# Altium PCB Ad_Fpga.PcbDoc (part 3 of 8)
Units mil, origin at the board's own origin, x right, y up, seen from the top; angles counter-clockwise.
Board outline 5995 x 3921.26 mil, 6 copper layers (Top Layer, GND, Mid-Layer 1, Mid-Layer 2, VCC, Bottom Layer); 476 components, 538 nets, 2139 pads, 1047 vias.
Unrouted connection lines stored in the file: 2.
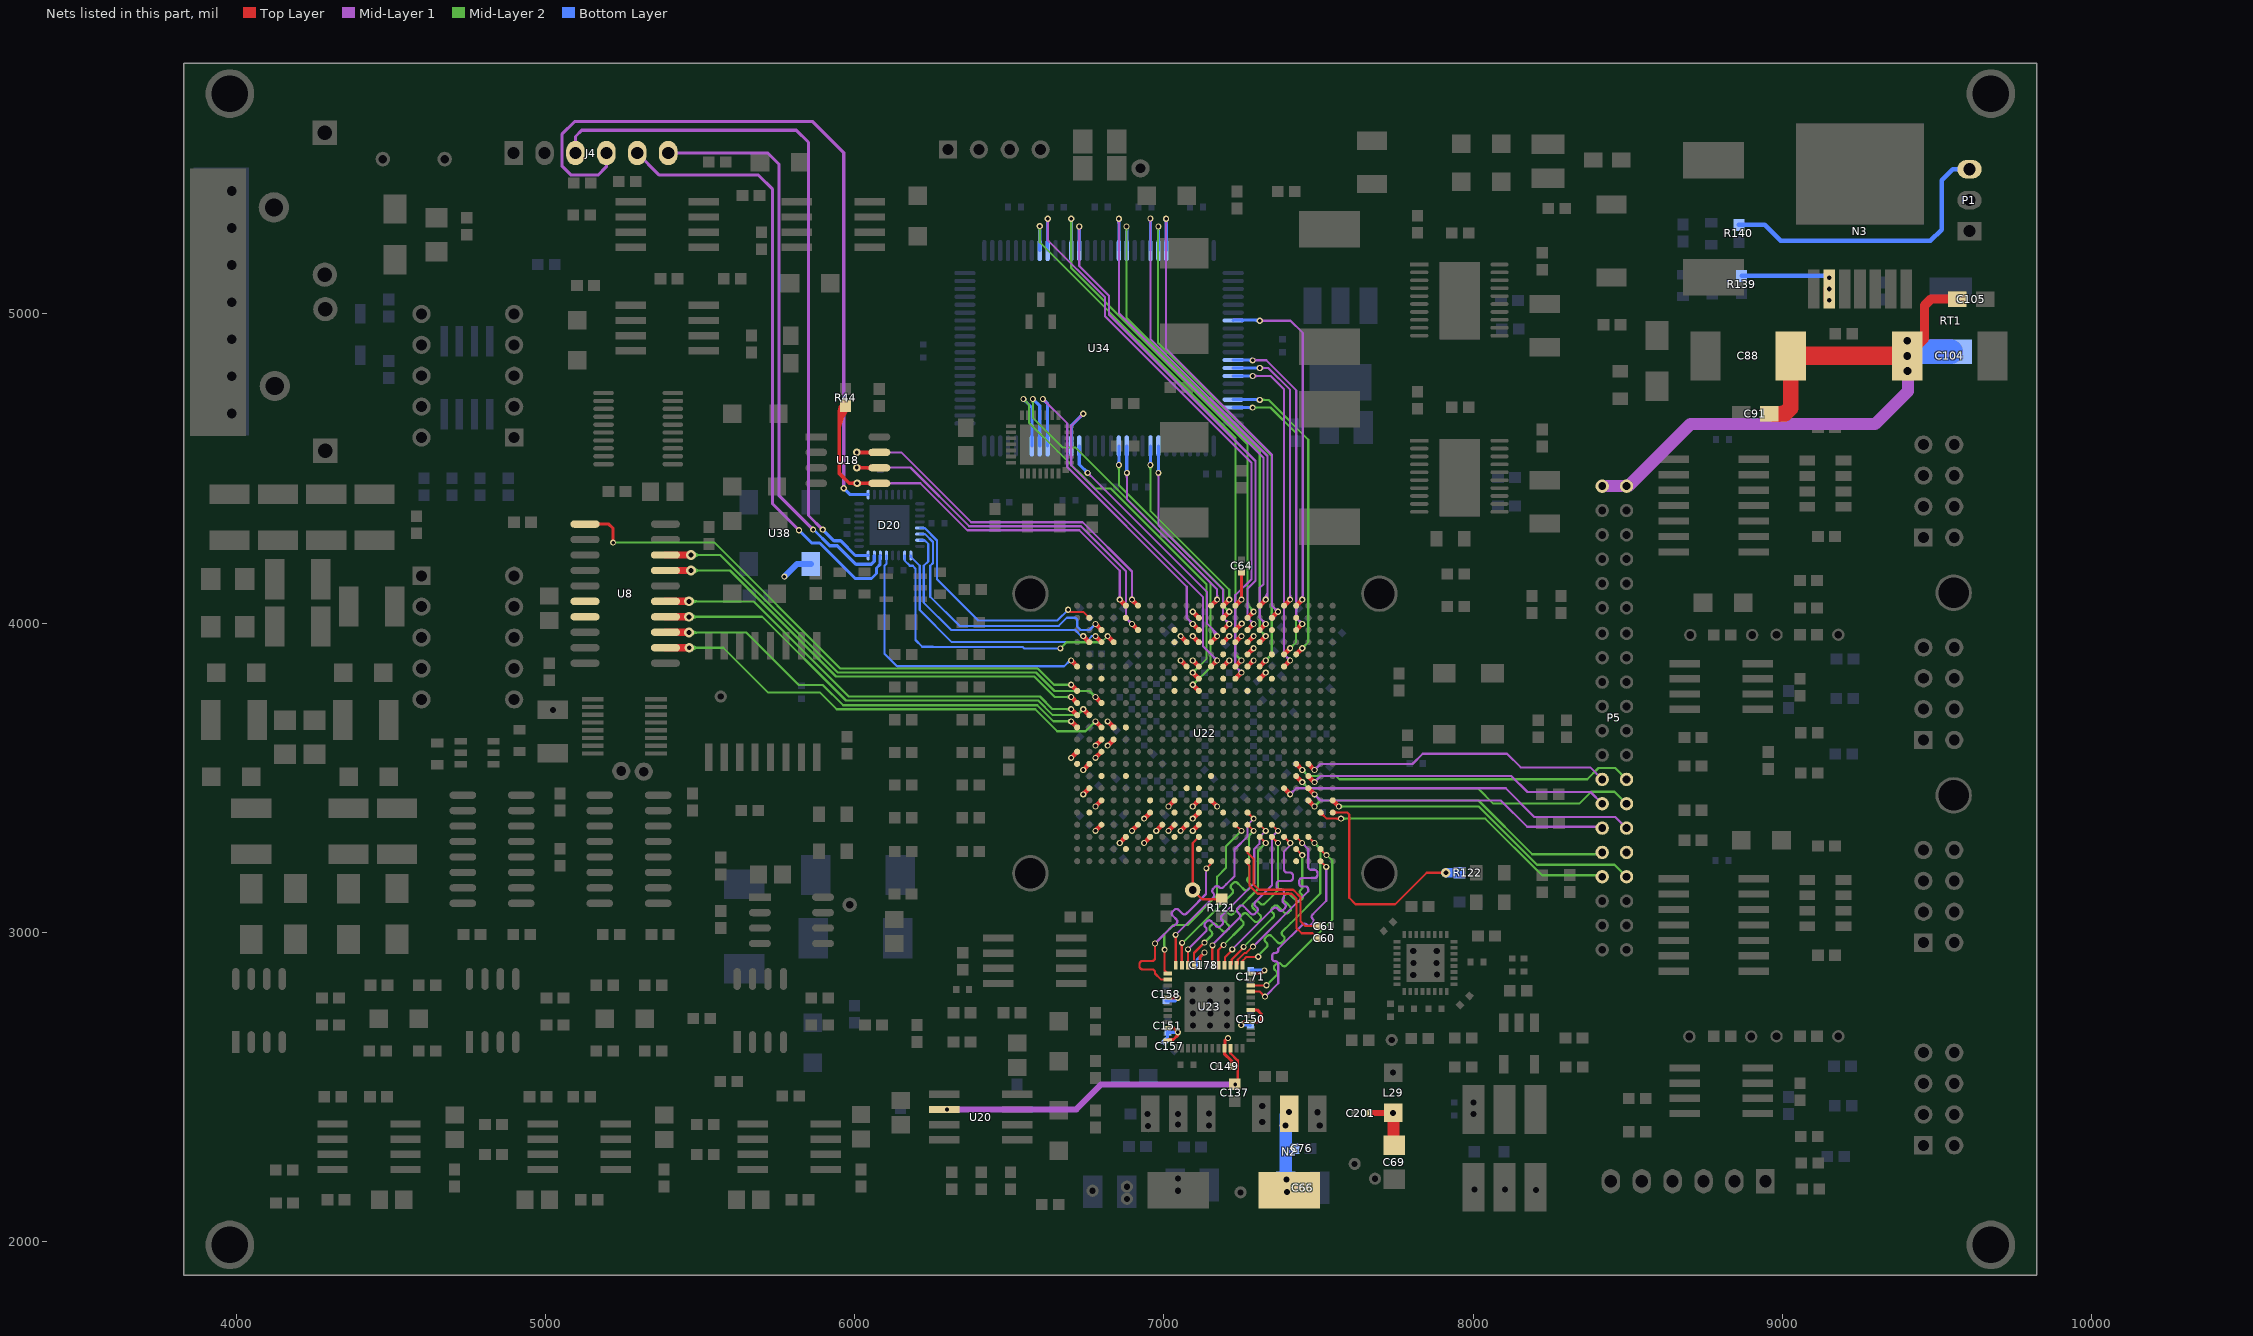
[diagram p7: the nets of this part, all layers, seen from the top]

## Via types
v1: diameter 19.68, hole 11.81, Top Layer to Bottom Layer, 523 vias
v2: diameter 50, hole 25, Top Layer to Bottom Layer, 162 vias
v3: diameter 30, hole 15, Top Layer to Bottom Layer, 100 vias
v4: diameter 39.37, hole 19.68, Top Layer to Bottom Layer, 75 vias
v5: diameter 31.5, hole 15.75, Top Layer to Bottom Layer, 44 vias
v6: diameter 40, hole 20, Top Layer to Bottom Layer, 38 vias
v7: diameter 24, hole 12, Top Layer to Bottom Layer, 33 vias
v8: diameter 47.24, hole 23.62, Top Layer to Bottom Layer, 24 vias
v9: diameter 59.06, hole 31.5, Top Layer to Bottom Layer, 10 vias
v10: diameter 60, hole 30, Top Layer to Bottom Layer, 9 vias
v11: diameter 25.98, hole 12.99, Top Layer to Bottom Layer, tented top, 9 vias
v12: diameter 23.62, hole 11.81, Top Layer to Bottom Layer, 8 vias
v13: diameter 50, hole 27.56, Top Layer to Bottom Layer, 4 vias
v14: diameter 51.18, hole 27.56, Top Layer to Bottom Layer, 2 vias
v15: diameter 39.37, hole 23.62, Top Layer to Bottom Layer, 2 vias
v16: diameter 80, hole 40, Top Layer to Bottom Layer, 1 vias
v17: diameter 47.24, hole 19.68, Top Layer to Bottom Layer, 1 vias
v18: diameter 47.24, hole 27.56, Top Layer to Bottom Layer, 1 vias
v19: diameter 22.05, hole 11.81, Top Layer to Bottom Layer, 1 vias

## Nets (pads, with @x,y where several pads share a name; then routed paths per layer and width w, separated by ;. In a path a pad name is that pad's centre, name@x,y a point inside that pad or via, vN(x,y) a via of type N, cw(c..) or ccw(c..) an arc to the next point about the centre after c; other vN are vias at no path point) (continued)
B1_NC34: U22.M21
B1_NC38: U22.D22
B1_NC39: U22.V21
B1_NC41: U22.M19 | length 27.8
  Top Layer w15: v1(7093.24,3327.65) U22.M19@7112.93,3347.34
B1_NC42: U22.N19 | length 27.8
  Top Layer w15: v1(7053.87,3327.65) U22.N19@7073.56,3347.34
B1_NC43: U22.M16
B1_NC44: U22.L15
B1_NC45: U22.P19 | length 27.8
  Top Layer w15: v1(7014.5,3327.65) U22.P19@7034.19,3347.34
B1_NC46: U22.P20
B1_NC49: U22.L17 | length 27.8
  Top Layer w15: U22.L17@7152.3,3426.08 v1(7171.99,3406.39)
B1_NC50: U22.K18
B1_NC51: U22.U19 | length 27.8
  Top Layer w15: v1(6896.39,3327.65) U22.U19@6916.08,3347.34
B1_NC52: U22.V20 | length 27.8
  Top Layer w15: v1(6857.02,3288.28) U22.V20@6876.71,3307.97
B1_NC53: U22.M17 | length 27.8
  Top Layer w15: v1(7093.24,3406.39) U22.M17@7112.93,3426.08
B1_NC54: U22.M18 | length 27.8
  Top Layer w15: v1(7093.24,3367.02) U22.M18@7112.93,3386.71
B1_NC55: U22.P17 | length 27.8
  Top Layer w15: v1(7014.5,3406.39) U22.P17@7034.19,3426.08
B1_NC56: U22.N16
B1_NC57: U22.P18
B1_NC58: U22.R19 | length 27.8
  Top Layer w15: v1(6975.13,3327.65) U22.R19@6994.82,3347.34
B1_NC59: U22.T20 | length 27.8
  Top Layer w15: v1(6935.76,3288.28) U22.T20@6955.45,3307.97
B4NC1: U22.J3 | length 29.6
  Top Layer w15: U22.J3@7231.04,3977.26 v1(7251.78,3998) v1@7252,3998
B4NC2: U22.M2 | length 27.8
  Top Layer w15: v1(7093.24,4036.32) U22.M2@7112.93,4016.63
B4NC3: U22.K5
B4NC4: U22.H6 | length 27.8
  Top Layer w15: U22.H6@7270.41,3859.15 v1(7290.1,3878.84)
B4NC5: U22.F3
B4NC7: U22.M4 | length 27.8
  Top Layer w15: v1(7093.24,3957.58) U22.M4@7112.93,3937.89
B4NC8: U22.J4 | length 27.8
  Top Layer w15: U22.J4@7231.04,3937.89 v1(7250.73,3957.58)
B4NC9: U22.K4 | length 27.8
  Top Layer w15: U22.K4@7191.67,3937.89 v1(7211.36,3957.58)
B4NC10: U22.N4 | length 27.8
  Top Layer w15: v1(7053.87,3957.58) U22.N4@7073.56,3937.89
B4NC11: U22.N6 | length 27.8
  Top Layer w15: v1(7053.87,3878.84) U22.N6@7073.56,3859.15
B4NC12: U22.P3
B4NC13: U22.F5
B4NC14: U22.K7
B4NC15: U22.K8
B4NC16: U22.V2
B4NC18: U22.P8
B4NC19: U22.H8
B4NC20: U22.K6 | length 27.8
  Top Layer w15: U22.K6@7191.67,3859.15 v1(7211.36,3878.84)
B4NC21: U22.P4
B4NC22: U22.G7 | length 27.8
  Top Layer w15: U22.G7@7309.78,3819.78 v1(7329.47,3839.47)
B4NC23: U22.F7
B4NC24: U22.H5 | length 27.8
  Top Layer w15: U22.H5@7270.41,3898.52 v1(7290.1,3918.21)
B4NC25: U22.P7
B4NC26: U22.H4 | length 27.8
  Top Layer w15: U22.H4@7270.41,3937.89 v1(7290.1,3957.58)
B4NC27: U22.M6 | length 27.8
  Top Layer w15: v1(7093.24,3878.84) U22.M6@7112.93,3859.15
B4NC29: U22.D2
BA#: U22.E1 U34.93 | length 1052.9
  Top Layer w15: U22.E1@7388.52,4056 v1(7408.21,4075.69)
  Mid-Layer 1 w7: v1(7310,4825) 7337.62,4825 7408.21,4754.41 v1(7408.21,4075.69) ; 7325.31,4825 cw(c7325.31,4840.31) 7314.48,4829.48 ccw(c7325.31,4840.31) 7325.31,4825 ; 7325.31,4825 ccw(c7325.31,4809.69) 7314.48,4820.52 cw(c7325.31,4809.69) 7325.31,4825 ; 7408.21,4091 cw(c7392.89,4091) 7403.72,4080.17 ccw(c7392.89,4091) 7408.21,4091 ; 7408.21,4091 ccw(c7423.52,4091) 7412.69,4080.17 cw(c7423.52,4091) 7408.21,4091
  Bottom Layer w10: U34.93@7224.06,4825.02 v1(7310,4825) ; 7298.25,4825.02 cw(c7298.25,4813.25) 7306.58,4821.58 ccw(c7298.25,4813.25) 7298.25,4825.02 ; 7298.37,4825.02 ccw(c7298.37,4836.63) 7306.58,4828.42 cw(c7298.37,4836.63) 7298.37,4825.02
BANK0_LED: R122.1 U22.A18 | length 759
  Top Layer w7: U22.A18@7546,3386.71 7593.29,3386.71 7599.39,3380.61 7599.39,3110.61 7620,3090 7748,3090 7850,3192 v5(7912,3192) ; U22.A18@7550.48,3382.22 cw(c7561.31,3371.4) 7561.31,3386.71 cw(c7561.31,3402.02) U22.A18@7550.48,3391.19
  Top Layer w10: U22.A18@7546,3386.71 U22.A18@7547.16,3385.55
  Bottom Layer w31.5: v5(7912,3192) R122.1@7956,3192
BANK2_NC3: U22.T18 | length 27.8
  Top Layer w15: v1(6935.76,3367.02) U22.T18@6955.45,3386.71
BANK2_NC4: U22.Y19 | length 27.8
  Top Layer w15: v1(6778.28,3327.65) U22.Y19@6797.97,3347.34
BANK2_NC6: U22.V15
BANK2_NC7: U22.AA18
BANK2_NC10: U22.AA14 | length 27.8
  Top Layer w15: v1(6738.91,3524.5) U22.AA14@6758.6,3544.19
BANK2_NC13: U22.W12 | length 27.8
  Top Layer w15: v1(6817.65,3603.24) U22.W12@6837.34,3622.93
BANK2_NC16: U22.V11
BANK2_NC20: U22.W11 | length 27.8
  Top Layer w15: v1(6817.65,3681.99) U22.W11@6837.34,3662.3
BANK2_NC25: U22.Y7
BANK2_NC27: U22.AA6
BANK2_NC28: D20.13 U22.AB6 | length 976.7
  Top Layer w15: v1(6699.54,3878.84) U22.AB6@6719.23,3859.15
  Bottom Layer w7: D20.13@6102.16,4218.57 6102.16,4191.88 6096.2,4185.92 6096.2,3899.8 6136,3860 6677,3860 6695.84,3878.84 v1(6699.54,3878.84)
BANK2_NC29: D20.7 U22.AA4 | length 816.2
  Top Layer w15: v1(6738.91,3957.58) U22.AA4@6758.6,3937.89
  Bottom Layer w7: D20.7@6210.43,4267.79 6225.49,4267.79 6237.14,4256.14 6237.14,4199.14 6223,4185 6223,4066 6311.4,3977.6 6533,3977.6 6712.52,3977.6 6732.54,3957.58 v1(6738.91,3957.58)
BANK2_NC30: U22.Y13 | length 27.8
  Top Layer w15: v1(6778.28,3563.87) U22.Y13@6797.97,3583.56
BANK2_NC31: D20.6 U22.Y3 | length 883.1
  Top Layer w15: v1(6778.28,3996.95) U22.Y3@6797.97,3977.26
  Bottom Layer w7: D20.6@6210.43,4287.47 6227.14,4287.47 6252.81,4261.81 6252.81,4194.06 6244,4185.25 6244,4085 6338.4,3990.6 6659.6,3990.6 6686,4017 6714,4017 6719.57,4011.43 6719.57,3988.93 6730.9,3977.6 6758.94,3977.6 v1(6778.28,3996.95)
BANK2_NC32: U22.Y12 | length 27.8
  Top Layer w15: v1(6778.28,3603.24) U22.Y12@6797.97,3622.93
BANK2_NC33: D20.10 U22.W4 | length 970.9
  Top Layer w15: v1(6817.65,3957.58) U22.W4@6837.34,3937.89
  Mid-Layer 2 w7: v1(6665,3918) 6684.55,3937.55 6797.62,3937.55 v1(6817.65,3957.58)
  Bottom Layer w7: D20.10@6161.21,4218.57 6161.21,4201.9 6177.2,4185.92 6177.2,4185 6187,4185 6196,4176 6196,3945 6218,3923 6253,3923 6253.5,3922.5 6469.85,3922.5 6470.03,3922.68 6542.32,3922.68 6547,3918 6664,3918 v1(6665,3918)
BANK2_NC34: D20.9 U22.Y4 | length 835.7
  Top Layer w15: v1(6778.28,3957.58) U22.Y4@6797.97,3937.89
  Bottom Layer w7: D20.9@6180.9,4218.57 6180.9,4214.1 6210,4185 6210,4042 6313.77,3938.23 6746.92,3938.23 6766.27,3957.58 v1(6778.28,3957.58)
BANK2_NC35: D20.5 U22.AA2 | length 771.3
  Top Layer w7: v1(6690,4043) 6691,4043 6698,4036 6739.23,4036 U22.AA2@6758.6,4016.63
  Bottom Layer w7: D20.5@6210.43,4307.16 6225.84,4307.16 6265.81,4267.19 6265.81,4141.19 6399,4008 6655,4008 v1(6690,4043)
BANK2_NC37: U22.T17
BANK2_NC38: U22.Y17 | length 27.8
  Top Layer w15: v1(6778.28,3406.39) U22.Y17@6797.97,3426.08
BANK2_NC39: U22.AB14
BANK2_NC40: U22.AA16 | length 27.8
  Top Layer w15: v1(6738.91,3445.76) U22.AA16@6758.6,3465.45
BANK2_NC41: U22.Y15
BANK2_NC42: U22.AB13 | length 27.8
  Top Layer w15: v1(6699.54,3563.87) U22.AB13@6719.23,3583.56
BATT12V: C88.1 C91.1 C104.1 C105.1 N3.2 P5.39 P5.40 R139.2 RT1.2 | length 2623.4
  Top Layer w30: v2(9405.2,4864) 9461,4919.8 9461,5027 9482,5048 C105.1@9567,5048
  Top Layer w36: v3(9152,5044.56) v3(9152,5080.78)
  Top Layer w50: C91.1@8958,4677 9010,4677 9027.8,4694.8 ; C91.1@8963,4677 ccw(c8979.76,4742.82) 9027.79,4694.79 ; C88.1@9027.8,4864 9027.8,4694.8
  Top Layer w60: C88.1@9027.8,4864 v2(9405.2,4864)
  Mid-Layer 1 w39.37: P5.39@8417.26,4443.22 8496,4443.22 8503.22,4443.22 8704,4644 9301,4644 9407,4750 v2@9407,4815
  Bottom Layer w15: R139.2@8869,5123 9146,5123 v3(9152,5117)
  Bottom Layer w80: v2@9420,4878 RT1.2@9545,4878
  other v2: 9406,4815 9405,4913
BATTI: P1.3 R140.2 | length 956.3
  Bottom Layer w15: R140.2@8860,5288 8944,5288 8995,5237 9480,5237 9516,5273 9516,5432 9552.24,5468.24 P1.3@9606.26,5468.24
BB#: U22.E6 U34.94 | length 1228.5
  Top Layer w15: U22.E6@7388.52,3859.15 v1(7408.21,3878.84)
  Mid-Layer 1 w7: v1(7287,4799) 7345.23,4799 7388.18,4756.05 7388.18,3910.02 7388,3909.84 7388,3899.04 v1(7408.21,3878.84) ; 7302.31,4799 cw(c7302.31,4814.31) 7291.48,4803.48 ccw(c7302.31,4814.31) 7302.31,4799 ; 7302.31,4799 ccw(c7302.31,4783.69) 7291.48,4794.52 cw(c7302.31,4783.69) 7302.31,4799 ; 7397.38,3889.66 cw(c7386.55,3878.84) 7401.86,3878.84 ccw(c7386.55,3878.84) 7397.38,3889.66 ; 7397.38,3889.66 ccw(c7408.21,3900.49) 7408.21,3885.18 cw(c7408.21,3900.49) 7397.38,3889.66
  Bottom Layer w10: U34.94@7224.06,4799.43 7286.57,4799.43 v1(7287,4799) ; 7274.26,4799.43 cw(c7274.26,4786.26) 7283.58,4795.58 ccw(c7274.26,4786.26) 7274.26,4799.43 ; 7276.35,4799.43 ccw(c7276.35,4809.65) 7283.58,4802.42 cw(c7276.35,4809.65) 7276.35,4799.43
CK: C64.1 U22.J1 | length 171.7
  Top Layer w10: C64.1@7247.48,4160.16 cw(c7239.65,4152.33) 7250.73,4152.33 ; v1(7250.73,4075.69) 7250.73,4163.41 C64.1@7251.02,4163.7 ; 7250.73,4150.93 cw(c7263.79,4150.93) C64.1@7254.55,4160.16 ; 7250.73,4087.38 cw(c7239.04,4087.38) 7247.3,4079.11 ccw(c7239.04,4087.38) 7250.73,4087.38 ; 7250.73,4087.38 ccw(c7262.42,4087.38) 7254.15,4079.11 cw(c7262.42,4087.38) 7250.73,4087.38
  Top Layer w15: U22.J1@7231.04,4056 v1(7250.73,4075.69)
CKE#: U22.D1 U34.87 | length 1228.2
  Top Layer w15: U22.D1@7427.89,4056 v1(7447.58,4075.69)
  Mid-Layer 1 w7: v1(7310,4978) 7409.62,4978 7449,4938.62 7449,4077.11 v1(7447.58,4075.69) ; v1@7314.48,4973.52 cw(c7325.31,4962.69) 7325.31,4978 cw(c7325.31,4993.31) v1@7314.48,4982.48 ; v1@7443.09,4080.17 ccw(c7428.83,4094.44) 7449,4094.44 cw(c7428.83,4094.44) v1@7443.09,4080.17 ; 7449,4087.56 ccw(c7459.45,4087.56) 7452.06,4080.17 cw(c7459.45,4087.56) 7449,4087.56
  Bottom Layer w10: U34.87@7224.06,4978.57 7225.49,4980 7308,4980 v1(7310,4978) ; U34.87@7252.95,4977.23 cw(c7259.64,4970.55) 7259.64,4980 ; 7293.48,4980 cw(c7293.48,4961.48) v1@7306.58,4974.58
CML: C137.2 U20.2 U23.34 | length 1147.2
  Top Layer w8: U20.2@6289,2426.21 6297.79,2426.21 v1(6298,2426) ; 7223.36,2599.85 7215.11,2608.11 7215.11,2623.8 U23.34@7215.31,2624 7215.31,2607.9 7238.3,2584.91 7238.3,2517.3 C137.2@7229,2508 C137.2@7239.3,2518.3
  Mid-Layer 1 w20: v1(6298,2426) 6716,2426 6797,2507 v1(7231,2507)
CPLD_TCK: D20.16 J4.3 | length 2286
  Mid-Layer 1 w10: J4.3@5095.9,5520.46 5095.9,5573.9 5116.28,5594.28 5810.72,5594.28 5850,5555 5850,4348 v1(5896,4302)
  Bottom Layer w10: v1(5896,4302) 5932,4266 5954,4266 6001.43,4218.57 D20.16@6043.1,4218.57
CPLD_TDI: D20.14 J4.5 | length 2011
  Mid-Layer 1 w10: J4.5@5295.9,5520.46 5367.36,5449 5688,5449 5734,5403 5734,4385 v1(5819,4300)
  Bottom Layer w10: v1(5819,4300) 5860,4259 5886,4259 6001,4144 6054,4144 6070,4160 6070,4178 6081.7,4189.7 6081.7,4217.8 D20.14@6082.47,4218.57
CPLD_TDO: D20.25 J4.4 | length 2458.1
  Mid-Layer 1 w10: J4.4@5195.9,5520.46 5195.9,5475.9 5169,5449 5082,5449 5052,5479 5052,5581 5093,5622 5864,5622 5964,5522 v1(5964,4436)
  Bottom Layer w10: v1(5964,4436) 5984.57,4415.43 D20.25@6043.1,4415.43
CPLD_TMS: D20.15 J4.6 | length 1868.8
  Mid-Layer 1 w10: J4.6@5395.9,5520.46 5718.54,5520.46 5754,5485 5754,4413 v1(5865,4302)
  Bottom Layer w10: v1(5865,4302) 5866,4301 5867.52,4301 5918.52,4250 5943,4250 6003,4190 6053,4190 6062.79,4199.79 D20.15@6062.79,4218.57
D0: U22.B22 U23.45 | length 631.3
  Top Layer w7: U23.45@7280.71,2807.5 7309.5,2807.5 7327,2790 v1(7327,2791) ; U22.B22@7506.63,3227.37 U22.B22@7506.63,3229.23 7506.77,3229.23 v1(7525,3211)
  Mid-Layer 1 w7: v1(7327,2791) 7370,2834 7370,2878 7370,2896.05 ccw(c7360.55,2896.05) 7360.55,2905.5 7359.6,2905.5 cw(c7359.6,2914.95) 7350.15,2914.95 7350.15,2923.05 cw(c7359.6,2923.05) 7359.6,2932.5 7360.55,2932.5 ccw(c7360.55,2941.95) 7370,2941.95 7370,2946 7448.18,3024.18 cw(c7454.86,3017.5) 7461.54,3024.18 7462.22,3023.51 ccw(c7468.9,3030.19) 7475.58,3023.51 7481.31,3029.23 ccw(c7474.63,3035.92) 7481.31,3042.6 7480.64,3043.27 cw(c7487.32,3049.95) 7480.64,3056.64 7483.5,3059.5 7525,3101 v1(7525,3211)
D1: U22.B21 U23.46 | length 631.3
  Top Layer w7: U23.46@7280.71,2827.2 v1@7332,2827.2 ; U22.B21@7506.63,3268.6 7506.63,3267.28 v1@7525,3248.91
  Mid-Layer 2 w7: v1(7332,2828) 7360.73,2856.73 7363.59,2859.59 ccw(c7356.91,2866.28) 7363.59,2872.96 7358.29,2878.26 cw(c7364.97,2884.94) 7358.29,2891.62 7364.02,2897.35 cw(c7370.7,2890.67) 7377.38,2897.35 7382.68,2892.05 ccw(c7389.37,2898.73) 7396.05,2892.05 7459.5,2955.5 7544.34,3040.34 7544.34,3231.66 v1@7527,3249
  other v1: 7526,3248.91
D2: U22.C20 U23.1 | length 631.3
  Top Layer w7: U23.1@7254.71,2892.6 7254.71,2907.37 7267,2919.66 v19@7305,2919.66 ; U22.C20@7467.26,3307.97 v1(7486.95,3288.28)
  Mid-Layer 2 w7: v19(7305,2920) 7305,2924 7329.41,2948.41 7332.27,2951.27 ccw(c7325.59,2957.95) 7332.27,2964.63 7328.31,2968.59 cw(c7335,2975.27) 7328.31,2981.95 7334.04,2987.68 cw(c7340.72,2981) 7347.41,2987.68 7358.04,2977.04 7368.68,2966.41 ccw(c7375.36,2973.09) 7382.04,2966.41 7387.77,2972.13 ccw(c7381.09,2978.82) 7387.77,2985.5 7383.82,2989.45 cw(c7390.5,2996.14) 7383.82,3002.82 7410,3029 7505.66,3124.66 7505.66,3223.18 7506.29,3223.81 7506.29,3268.94 v1(7486.95,3288.28)
D3: U22.D20 U23.2 | length 631.3
  Top Layer w7: U23.2@7235.01,2892.6 7238.91,2896.5 7238.91,2910.69 7260.88,2932.66 7266.01,2932.66 7282.35,2949 7291,2949 7291,2950 v1(7288,2953) ; U22.D20@7427.89,3307.97 7447,3288.86 v1(7447,3288.28)
  Mid-Layer 1 w7: v1(7288,2953) 7466.92,3131.92 7466.92,3138.05 ccw(c7457.47,3138.05) 7457.47,3147.5 7447,3147.5 cw(c7447,3156.95) 7437.55,3156.95 7437.55,3165.05 cw(c7447,3165.05) 7447,3174.5 7466.92,3174.5 7486.84,3174.5 ccw(c7486.84,3183.95) 7496.29,3183.95 7496.29,3192.05 ccw(c7486.84,3192.05) 7486.84,3201.5 7476.37,3201.5 cw(c7476.37,3210.95) 7466.92,3210.95 7466.92,3215 7466.92,3268.36 v1(7447,3288.28)
D4: U22.D21 U23.3 | length 631.3
  Top Layer w7: U23.3@7215.31,2892.6 7219.21,2896.5 7219.21,2911.21 v1@7258,2950 ; U22.D21@7427.89,3268.6 7427.98,3268.6 v1(7447.58,3249)
  Mid-Layer 2 w7: v1(7258,2952) 7350.63,3044.63 7353.49,3047.49 ccw(c7346.81,3054.17) 7353.49,3060.85 7349.85,3064.5 cw(c7356.53,3071.18) 7349.85,3077.86 7355.58,3083.59 cw(c7362.26,3076.91) 7368.94,3083.59 7379.26,3073.26 7389.59,3062.94 ccw(c7396.27,3069.62) 7402.95,3062.94 7408.68,3068.67 ccw(c7402,3075.35) 7408.68,3082.03 7398.36,3092.36 7388.03,3102.68 cw(c7394.71,3109.36) 7388.03,3116.04 7393.76,3121.77 cw(c7400.44,3115.09) 7407.12,3121.77 7417.45,3111.45 7427.77,3101.12 ccw(c7434.45,3107.81) 7441.14,3101.12 7446.86,3106.85 ccw(c7440.18,3113.53) 7446.86,3120.22 7441.5,3125.58 cw(c7446.46,3130.54) 7441.5,3135.5 7447.58,3141.58 v1(7447.58,3249)
D5: U22.E20 U23.4 | length 631.3
  Top Layer w7: U23.4@7195.61,2892.6 7197.34,2894.33 7197.34,2918.34 7222,2943 v1(7221,2944) ; U22.E20@7388.52,3307.97 v1(7408.49,3288) v1@7409,3288
  Mid-Layer 1 w7: v1(7221,2944) 7345.5,3068.5 7353.54,3076.54 cw(c7360.23,3069.86) 7366.91,3076.54 7372.11,3071.34 ccw(c7378.79,3078.03) 7385.47,3071.34 7391.2,3077.07 ccw(c7384.52,3083.75) 7391.2,3090.44 7386,3095.64 cw(c7392.68,3102.32) 7386,3109 7388.86,3111.86 7388.86,3129.05 ccw(c7379.41,3129.05) 7379.41,3138.5 7373.7,3138.5 cw(c7373.7,3147.95) 7364.25,3147.95 7364.25,3156.05 cw(c7373.7,3156.05) 7373.7,3165.5 7388.86,3165.5 7407.65,3165.5 ccw(c7407.65,3174.95) 7417.1,3174.95 7417.1,3183.05 ccw(c7407.65,3183.05) 7407.65,3192.5 7398.31,3192.5 cw(c7398.31,3201.95) 7388.86,3201.95 7388.86,3206 7388.86,3261.06 7409,3281.2 v1@7409,3288.28
D6: U22.F20 U23.5 | length 631.3
  Top Layer w7: U23.5@7173,2895.51 U23.5@7175.91,2892.6 7175.91,2941.91 7192,2958 v1(7193,2958) ; U22.F20@7349.15,3307.97 v1(7368.84,3288.28)
  Mid-Layer 2 w7: v1(7193,2958) 7193,2959 7252.24,3018.24 7255.1,3021.1 ccw(c7248.42,3027.78) 7255.1,3034.46 7250.12,3039.44 cw(c7256.81,3046.12) 7250.12,3052.8 7255.85,3058.53 cw(c7262.53,3051.85) 7269.22,3058.53 7280.87,3046.87 7292.53,3035.22 ccw(c7299.21,3041.9) 7305.89,3035.22 7311.62,3040.94 ccw(c7304.94,3047.63) 7311.62,3054.31 7299.96,3065.96 7288.31,3077.62 cw(c7294.99,3084.3) 7288.31,3090.99 7294.04,3096.71 cw(c7300.72,3090.03) 7307.4,3096.71 7312.37,3091.74 ccw(c7319.06,3098.42) 7325.74,3091.74 7332.5,3098.5 7368.84,3134.84 v1(7368.84,3288.28)
D7: U22.F19 U23.6 | length 631.3
  Top Layer w7: U23.6@7156.21,2892.6 7156.21,2931 7156.21,2935.21 7156.21,2956.21 v1(7157,2957) ; U22.F19@7349.15,3347.34 v1(7368.84,3327.65)
  Mid-Layer 1 w7: v1(7157,2957) 7157,2959 7241,3043 7243.86,3045.86 ccw(c7237.18,3052.55) 7243.86,3059.23 7238.73,3064.37 cw(c7245.41,3071.05) 7238.73,3077.73 7244.45,3083.46 cw(c7251.14,3076.78) 7257.82,3083.46 7269.64,3071.64 7281.46,3059.82 ccw(c7288.14,3066.5) 7294.82,3059.82 7300.55,3065.55 ccw(c7293.87,3072.23) 7300.55,3078.91 7295.41,3084.05 cw(c7302.09,3090.73) 7295.41,3097.41 7310.5,3112.5 7349.49,3151.49 7349.49,3308.31 v1(7368.84,3327.65)
D8: U22.G20 U23.9 | length 631.3
  Top Layer w7: U23.9@7097.21,2892.6 7097.21,2932.21 v1(7131,2966) ; U22.G20@7309.78,3307.97 v1(7329.47,3288.28)
  Mid-Layer 2 w7: v1(7131,2966) 7150.5,2985.5 7153.36,2988.36 ccw(c7146.68,2995.05) 7153.36,3001.73 7149.76,3005.34 cw(c7156.44,3012.02) 7149.76,3018.7 7155.48,3024.43 cw(c7162.17,3017.75) 7168.85,3024.43 7179.14,3014.14 7189.43,3003.85 ccw(c7196.11,3010.53) 7202.79,3003.85 7208.52,3009.58 ccw(c7201.84,3016.26) 7208.52,3022.94 7198.23,3033.23 7187.94,3043.52 cw(c7194.62,3050.2) 7187.94,3056.88 7193.67,3062.61 cw(c7200.35,3055.93) 7207.03,3062.61 7210.64,3059 ccw(c7217.32,3065.69) 7224,3059 7240.5,3075.5 7304.12,3139.12 7304.12,3231 7304.12,3262.94 v1(7329.47,3288.28)
D9: U22.G19 U23.10 | length 631.3
  Top Layer w7: U23.10@7077.51,2892.6 7077.51,2940.49 7077,2941 7077,2943 v1(7078,2944) ; U22.G19@7309.78,3347.34 v1(7329.47,3327.65)
  Mid-Layer 1 w7: v1@7081,2941 v1(7078,2944) 7132.5,2998.5 7135.36,3001.36 ccw(c7128.68,3008.05) 7135.36,3014.73 7133.93,3016.16 cw(c7140.61,3022.84) 7133.93,3029.53 7139.66,3035.25 cw(c7146.34,3028.57) 7153.02,3035.25 7161.14,3027.14 7169.25,3019.02 ccw(c7175.94,3025.7) 7182.62,3019.02 7188.35,3024.75 ccw(c7181.66,3031.43) 7188.35,3038.11 7186.91,3039.55 cw(c7193.59,3046.23) 7186.91,3052.91 7198,3064 7292,3158 7292,3269 7308.66,3285.66 7308.66,3306.84 v1(7329.47,3327.65)
D10: U22.H19 U23.11 | length 631.3
  Top Layer w7: U23.11@7057.81,2892.6 v1@7057.81,2962.81 ; U22.H19@7270.41,3347.34 v1(7290.1,3327.65)
  Mid-Layer 2 w7: v1(7059,2965) 7061,2965 7174,3078 7220.59,3124.59 ccw(c7213.91,3131.27) 7220.59,3137.95 7218.64,3139.9 cw(c7225.32,3146.59) 7218.64,3153.27 7224.36,3159 cw(c7231.05,3152.31) 7237.73,3159 7246.36,3150.36 7259.02,3137.7 ccw(c7265.71,3144.38) 7272.39,3137.7 7278.12,3143.43 ccw(c7271.43,3150.11) 7278.12,3156.79 7272.14,3162.77 cw(c7278.82,3169.45) 7272.14,3176.14 7275,3179 7275,3262 7275,3312.56 v1(7290.1,3327.65)
D11: U22.H18 U23.12 | length 631.3
  Top Layer w7: v1(7038,2991) 7037,2990 7037,2987 7038.11,2985.89 U23.12@7038.11,2892.6 ; U22.H18@7270.41,3386.71 v1(7290.1,3367.02)
  Mid-Layer 1 w7: v1(7038,2991) 7142.08,3095.08 7156.9,3109.9 7159.76,3112.76 ccw(c7153.08,3119.45) 7159.76,3126.13 7159.01,3126.89 cw(c7165.69,3133.57) 7159.01,3140.25 7164.73,3145.98 cw(c7171.42,3139.3) 7178.1,3145.98 7178.86,3145.22 ccw(c7185.54,3151.9) 7192.22,3145.22 7201.5,3154.5 7228,3181 7228,3267.25 7270.75,3310 7270.75,3347.68 v1(7290.1,3367.02)
D12: U22.J19 U23.13 | length 631.3
  Top Layer w7: v1(7002,2943) 7002,2876.71 U23.13@7012.11,2866.6 ; U22.J19@7231.04,3347.34 v1(7250.73,3327.65)
  Mid-Layer 2 w7: v1(7002,2943) 7002,2940 7001,2939 7001,2993 7031,3023 7076,3023 7172,3119 7172,3179 7201,3208 7201,3277.93 v1(7250.73,3327.65)
D13: U22.L22 U23.14 | length 631.3
  Top Layer w7: v1(6971,2963) 6971,2929 6971,2915.85 cw(c6961.55,2915.85) 6961.55,2906.4 6930.45,2906.4 ccw(c6930.45,2896.95) 6921,2896.95 6921,2888.85 ccw(c6930.45,2888.85) 6930.45,2879.4 6961.55,2879.4 cw(c6961.55,2869.95) 6971,2869.95 6971,2865.9 6990,2846.9 U23.14@7012.11,2846.9 ; v1(7137,3206) 7152.3,3221.3 U22.L22@7152.3,3229.23
  Mid-Layer 1 w7: v1(6971,2963) 7028,3020 7033,3020 7037.5,3024.5 7040.36,3027.36 ccw(c7033.68,3034.05) 7040.36,3040.73 7027.98,3053.11 cw(c7034.66,3059.79) 7027.98,3066.47 7033.71,3072.2 cw(c7040.39,3065.52) 7047.07,3072.2 7059.46,3059.82 ccw(c7066.14,3066.5) 7072.82,3059.82 7082.5,3069.5 7136,3123 7136,3206 v1(7137,3206)
DA0: U22.J6 U34.58 | length 1873
  Top Layer w15: U22.J6@7231.04,3859.15 v1(7250.73,3878.84)
  Mid-Layer 2 w7: v1@6593.52,5279.52 cw(c6582.69,5268.69) 6598,5268.69 cw(c6613.31,5268.69) v1@6602.48,5279.52 ; v1(6598,5284) 6598,5232 7231.38,4598.62 7231.38,3898.18 v1(7250.73,3878.84) ; 7239.9,3889.66 cw(c7229.07,3878.84) 7244.38,3878.84 ccw(c7229.07,3878.84) 7239.9,3889.66 ; 7239.9,3889.66 ccw(c7250.73,3900.49) 7250.73,3885.18 cw(c7250.73,3900.49) 7239.9,3889.66
  Bottom Layer w10: v1@6594.58,5280.58 cw(c6586.14,5272.14) 6598.07,5272.14 ; v1(6598,5284) 6598.07,5283.93 U34.58@6598.07,5204.94 ; 6598.07,5272.48 cw(c6609.52,5272.48) v1@6601.42,5280.58
DA1: U22.J7 U34.59 | length 1993.6
  Top Layer w15: U22.J7@7231.04,3819.78 v1(7250.73,3839.47)
  Mid-Layer 1 w7: v1@6619.52,5303.52 cw(c6608.69,5292.69) 6624,5292.69 cw(c6639.31,5292.69) v1@6628.48,5303.52 ; v1(6624,5308) 6624,5238.88 6809,5053.88 6809,4993 7283,4519 7283,4142 7230.7,4089.7 7230.7,3870.13 7230,3869.43 7230,3860.19 v1(7250.73,3839.47) ; 7239.9,3850.29 cw(c7229.07,3839.47) 7244.38,3839.47 ccw(c7229.07,3839.47) 7239.9,3850.29 ; 7239.9,3850.29 ccw(c7250.73,3861.12) 7250.73,3845.81 cw(c7250.73,3861.12) 7239.9,3850.29
  Bottom Layer w10: v1@6620.58,5304.58 cw(c6613.13,5297.13) 6623.66,5297.13 ; U34.59@6623.66,5204.94 6623.66,5307.66 v1(6624,5308) ; 6623.66,5295.49 cw(c6636.51,5295.49) v1@6627.42,5304.58
DA2: U22.H2 U34.62 | length 1740.4
  Top Layer w15: U22.H2@7270.41,4016.63 v1(7290.1,4036.32)
  Mid-Layer 2 w7: v1@6695.52,5303.52 cw(c6684.69,5292.69) 6700,5292.69 cw(c6715.31,5292.69) v1@6704.48,5303.52 ; v1(6700,5308) 6700,5148.38 7270.75,4577.63 7270.75,4067.43 7271,4067.18 7271,4059 7290.1,4039.9 v1(7290.1,4036.32) ; 7281.38,4045.18 ccw(c7294.99,4048.82) v1@7289.86,4035.7 ; 7276.73,4053.27 cw(c7259.78,4036.32) 7283.75,4036.32 ccw(c7259.78,4036.32) 7276.73,4053.27
  Bottom Layer w10: v1@6696.58,5304.58 cw(c6687.26,5295.26) 6700.43,5295.26 ; v1(6700,5308) 6700.43,5307.57 U34.62@6700.43,5204.94 ; 6700.43,5297.35 cw(c6710.65,5297.35) v1@6703.42,5304.58
DA3: U22.H3 U34.63 | length 1737.1
  Top Layer w15: U22.H3@7270.41,3977.26 v1(7290.1,3996.95)
  Mid-Layer 1 w7: v1@6721.52,5278.52 cw(c6710.69,5267.69) 6726,5267.69 cw(c6741.31,5267.69) v1@6730.48,5278.52 ; v1(6726,5283) 6726,5155.26 6822,5059.26 6822,4998.38 7296,4524.38 7296,4136.62 7270.75,4111.37 7270.75,4016.29 v1(7290.1,3996.95) ; 7279.27,4007.77 cw(c7268.44,3996.95) 7283.75,3996.95 ccw(c7268.44,3996.95) 7279.27,4007.77 ; 7279.27,4007.77 ccw(c7290.1,4018.6) 7290.1,4003.29 cw(c7290.1,4018.6) 7279.27,4007.77
  Bottom Layer w10: v1@6722.58,5279.58 cw(c6714.25,5271.25) 6726.02,5271.25 ; U34.63@6726.02,5204.94 v1(6726,5283) ; 6726.02,5271.37 cw(c6737.63,5271.37) v1@6729.42,5279.58
DA4: U22.G3 U34.68 | length 1739.4
  Top Layer w15: U22.G3@7309.78,3977.26 v1(7329.47,3996.95)
  Mid-Layer 1 w7: v1@6849.52,5303.52 cw(c6838.69,5292.69) 6854,5292.69 cw(c6869.31,5292.69) v1@6858.48,5303.52 ; v1(6854,5308) 6854,5003.15 7322,4535.15 7322,4125.85 7310,4113.85 7310,4016.41 v1(7329.47,3996.95) ; 7318.64,4007.77 cw(c7307.81,3996.95) 7323.12,3996.95 ccw(c7307.81,3996.95) 7318.64,4007.77 ; 7318.64,4007.77 ccw(c7329.47,4018.6) 7329.47,4003.29 cw(c7329.47,4018.6) 7318.64,4007.77
  Bottom Layer w10: v1@6850.58,5304.58 cw(c6842.37,5296.37) 6853.98,5296.37 ; U34.68@6853.98,5204.94 v1(6854,5308) ; 6853.98,5296.25 cw(c6865.75,5296.25) v1@6857.42,5304.58
DA5: U22.G4 U34.69 | length 1708.7
  Top Layer w15: U22.G4@7309.78,3937.89 v1(7329.47,3957.58)
  Mid-Layer 2 w7: v1@6874.52,5278.52 cw(c6863.69,5267.69) 6879,5267.69 cw(c6894.31,5267.69) v1@6883.48,5278.52 ; v1(6879,5283) 6879,4987.77 7310.12,4556.65 7310.12,3977.6 7329.47,3958.26 v1(7329.47,3957.58) ; 7318.15,3969.57 cw(c7306.16,3957.58) 7323.12,3957.58 ccw(c7306.16,3957.58) 7318.15,3969.57 ; 7319.81,3967.92 ccw(c7329.47,3977.58) 7329.47,3963.92 cw(c7329.47,3977.58) 7319.81,3967.92
  Bottom Layer w10: v1@6875.58,5279.58 cw(c6865.94,5269.94) 6879.57,5269.94 ; v1(6879,5283) 6879.57,5282.43 U34.69@6879.57,5204.94 ; 6879.57,5272.68 cw(c6889.32,5272.68) v1@6882.42,5279.58
DA6: U22.G1 U34.72 | length 1661.2
  Top Layer w15: U22.G1@7309.78,4056 v1(7329.47,4075.69)
  Mid-Layer 1 w7: v1@6951.52,5304.52 cw(c6940.69,5293.69) 6956,5293.69 cw(c6971.31,5293.69) v1@6960.48,5304.52 ; v1(6956,5309) 6956,4919.54 7335,4540.54 7335,4081.22 v1(7329.47,4075.69) ; 7332.07,4092.44 ccw(c7340.65,4087.48) v1@7333.83,4080.29 ; v1@7324.98,4080.17 ccw(c7300.79,4104.36) 7335,4104.36 cw(c7300.79,4104.36) v1@7324.98,4080.17 ; v1@7329.93,4075.22 ccw(c7317.69,4087.46) 7335,4087.46 cw(c7317.69,4087.46) v1@7329.93,4075.22
  Bottom Layer w10: v1@6952.58,5305.58 cw(c6943.49,5296.49) 6956.34,5296.49 ; v1(6956,5309) 6956.34,5308.66 U34.72@6956.34,5204.94 ; 6956.34,5298.13 cw(c6966.87,5298.13) v1@6959.42,5305.58
DA7: U22.G6 U34.73 | length 1759
  Top Layer w15: U22.G6@7309.78,3859.15 v1(7329.47,3878.84)
  Mid-Layer 2 w7: v1@6977.52,5278.52 cw(c6969.1,5270.1) 6981,5270.1 ; 6981,5265.27 cw(c6999.73,5265.27) v1@6986.48,5278.52 ; v1@6981,5281 6981,4907 7348.81,4539.19 7348.81,3898.86 7329.47,3879.52 v1(7329.47,3878.84) ; v1@7329.47,3885.18 ccw(c7329.47,3898.84) 7339.12,3889.18 cw(c7329.47,3898.84) v1@7329.47,3885.18 ; v1@7335.81,3878.84 cw(c7352.77,3878.84) 7340.78,3890.83 ccw(c7352.77,3878.84) v1@7335.81,3878.84
  Bottom Layer w10: v1@6978.58,5279.58 cw(c6970.48,5271.48) 6981.93,5271.48 ; U34.73@6981.93,5204.94 6981.93,5282.93 v1(6982,5283) ; 6981.93,5271.14 cw(c6993.86,5271.14) v1@6985.42,5279.58
DA8: U22.F2 U34.74 | length 1643.2
  Top Layer w15: U22.F2@7349.15,4016.63 v1(7368.84,4036.32)
  Mid-Layer 1 w7: v1@7002.52,5303.52 cw(c6991.69,5292.69) 7007,5292.69 cw(c7022.31,5292.69) v1@7011.48,5303.52 ; v1(7007,5308) 7007,4886.92 7349.49,4544.43 7349.49,4055.66 v1(7368.84,4036.32) ; 7358.01,4047.14 cw(c7347.18,4036.32) 7362.49,4036.32 ccw(c7347.18,4036.32) 7358.01,4047.14 ; 7358.01,4047.14 ccw(c7368.84,4057.97) 7368.84,4042.66 cw(c7368.84,4057.97) 7358.01,4047.14
  Bottom Layer w10: v1@7003.58,5304.58 cw(c6994.05,5295.05) 7007.52,5295.05 ; v1(7007,5308) 7007.52,5307.48 U34.74@7007.52,5204.94 ; 7007.52,5297.56 cw(c7017.44,5297.56) v1@7010.42,5304.58
DADIN: U8.17
DASCLK: U8.16
DB0: U22.K3 U34.8 | length 831.9
  Top Layer w15: U22.K3@7191.67,3977.26 v1(7211.36,3996.95)
  Mid-Layer 1 w7: v1(6982,4486) 6982,4317 7191.33,4107.67 7191.33,4016.97 v1(7211.36,3996.95) ; 6982,4470.69 cw(c6997.31,4470.69) 6986.48,4481.52 ccw(c6997.31,4470.69) 6982,4470.69 ; 6982,4470.69 ccw(c6966.69,4470.69) 6977.52,4481.52 cw(c6966.69,4470.69) 6982,4470.69 ; 7200.53,4007.77 cw(c7189.7,3996.95) 7205.01,3996.95 ccw(c7189.7,3996.95) 7200.53,4007.77 ; 7200.53,4007.77 ccw(c7211.36,4018.6) 7211.36,4003.29 cw(c7211.36,4018.6) 7200.53,4007.77
  Bottom Layer w10: U34.8@6981.93,4573.06 6981.93,4486.07 v1(6982,4486) ; v1@6978.58,4489.42 ccw(c6970.48,4497.52) 6981.93,4497.52 cw(c6970.48,4497.52) v1@6978.58,4489.42 ; 6981.93,4497.86 ccw(c6993.86,4497.86) 6985.42,4489.42 cw(c6993.86,4497.86) 6981.93,4497.86
DB1: U22.K1 U34.9 | length 763.6
  Top Layer w15: U22.K1@7191.67,4056 v1(7211.36,4075.69)
  Mid-Layer 2 w7: v1(6956,4511) 6956,4363 7211,4108 v1@7211,4076.04 ; 6956,4495.69 cw(c6971.31,4495.69) 6960.48,4506.52 ccw(c6971.31,4495.69) 6956,4495.69 ; 6956,4495.69 ccw(c6940.69,4495.69) 6951.52,4506.52 cw(c6940.69,4495.69) 6956,4495.69 ; v1@7206.87,4080.17 ccw(c7196.9,4090.14) 7211,4090.14 cw(c7196.9,4090.14) v1@7206.87,4080.17 ; 7211,4091.86 ccw(c7227.53,4091.86) 7215.84,4080.17 cw(c7227.53,4091.86) 7211,4091.86
  Bottom Layer w10: v1(6956,4511) 6956.34,4511.34 U34.9@6956.34,4573.06 ; v1@6952.58,4514.42 ccw(c6943.49,4523.51) 6956.34,4523.51 cw(c6943.49,4523.51) v1@6952.58,4514.42 ; 6956.34,4521.87 ccw(c6966.87,4521.87) 6959.42,4514.42 cw(c6966.87,4521.87) 6956.34,4521.87
DB2: U22.L1 U34.12 | length 779.3
  Top Layer w15: U22.L1@7152.3,4056 v1(7171.99,4075.69)
  Mid-Layer 1 w7: v1(6880,4486) 6880,4400.62 7171.99,4108.63 v1(7171.99,4075.69) ; 6880,4470.69 cw(c6895.31,4470.69) 6884.48,4481.52 ccw(c6895.31,4470.69) 6880,4470.69 ; 6880,4470.69 ccw(c6864.69,4470.69) 6875.52,4481.52 cw(c6864.69,4470.69) 6880,4470.69 ; 7171.99,4091 cw(c7156.67,4091) 7167.5,4080.17 ccw(c7156.67,4091) 7171.99,4091 ; 7171.99,4091 ccw(c7187.3,4091) 7176.47,4080.17 cw(c7187.3,4091) 7171.99,4091
  Bottom Layer w10: U34.12@6879.57,4573.06 6879.57,4486.43 v1(6880,4486) ; v1@6876.58,4489.42 ccw(c6869.35,4496.65) 6879.57,4496.65 cw(c6869.35,4496.65) v1@6876.58,4489.42 ; 6879.57,4498.74 ccw(c6892.74,4498.74) 6883.42,4489.42 cw(c6892.74,4498.74) 6879.57,4498.74
DB3: U22.K2 U34.13 | length 845.5
  Top Layer w15: U22.K2@7191.67,4016.63 v1(7211.36,4036.32)
  Mid-Layer 2 w7: v1(6854,4511) 6854,4446.62 7192,4108.62 7192,4055.67 v1(7211.36,4036.32) ; 6854,4495.69 cw(c6869.31,4495.69) 6858.48,4506.52 ccw(c6869.31,4495.69) 6854,4495.69 ; 6854,4495.69 ccw(c6838.69,4495.69) 6849.52,4506.52 cw(c6838.69,4495.69) 6854,4495.69 ; 7200.53,4047.14 cw(c7189.7,4036.32) 7205.01,4036.32 ccw(c7189.7,4036.32) 7200.53,4047.14 ; 7200.53,4047.14 ccw(c7211.36,4057.97) 7211.36,4042.66 cw(c7211.36,4057.97) 7200.53,4047.14
  Bottom Layer w10: v1(6854,4511) U34.13@6853.98,4573.06 ; v1@6850.58,4514.42 ccw(c6842.37,4522.63) 6853.98,4522.63 cw(c6842.37,4522.63) v1@6850.58,4514.42 ; 6853.98,4522.75 ccw(c6865.75,4522.75) 6857.42,4514.42 cw(c6865.75,4522.75) 6853.98,4522.75
DB4: U22.L4 U34.18 | length 1005.8
  Top Layer w15: U22.L4@7152.3,3937.89 v1(7171.99,3957.58)
  Mid-Layer 1 w7: v1(6753,4486) 7139.64,4099.36 7139.64,3997.36 7171.99,3965.01 v1(7171.99,3957.58) ; 7162.72,3968.48 ccw(c7180.76,3973.31) v1@7171.67,3957 ; 6763.83,4475.17 cw(c6774.65,4486) 6759.34,4486 ccw(c6774.65,4486) 6763.83,4475.17 ; 6763.83,4475.17 ccw(c6753,4464.35) 6753,4479.66 cw(c6753,4464.35) 6763.83,4475.17 ; 7155.9,3981.1 cw(c7132.37,3957.58) 7165.64,3957.58 ccw(c7132.37,3957.58) 7155.9,3981.1 ; 7167.85,3969.15 cw(c7156.27,3957.58) 7172.64,3957.58 ccw(c7156.27,3957.58) 7167.85,3969.15
  Bottom Layer w10: U34.18@6726.02,4573.06 6726.02,4512.98 v1(6753,4486) ; 6744.73,4494.27 cw(c6736.47,4486) 6748.16,4486 ccw(c6736.47,4486) 6744.73,4494.27 ; 6744.73,4494.27 ccw(c6753,4502.53) 6753,4490.84 cw(c6753,4502.53) 6744.73,4494.27
DB5: U22.L6 U34.19 | length 1290.5
  Top Layer w15: U22.L6@7152.3,3859.15 v1(7171.99,3878.84)
  Mid-Layer 1 w7: v1(6739,4677) 6700,4638 6700,4510 7126.64,4083.36 7126.64,3924.18 v1(7171.99,3878.84) ; 6728.17,4666.17 cw(c6739,4655.35) 6739,4670.66 ccw(c6739,4655.35) 6728.17,4666.17 ; 6728.17,4666.17 ccw(c6717.35,4677) 6732.66,4677 cw(c6717.35,4677) 6728.17,4666.17 ; 7161.16,3889.66 cw(c7150.33,3878.84) 7165.64,3878.84 ccw(c7150.33,3878.84) 7161.16,3889.66 ; 7161.16,3889.66 ccw(c7171.99,3900.49) 7171.99,3885.18 cw(c7171.99,3900.49) 7161.16,3889.66
  Bottom Layer w10: U34.19@6700.43,4573.06 6700.43,4638.43 v1(6739,4677) ; 6730.73,4668.73 cw(c6739,4660.47) 6739,4672.16 ccw(c6739,4660.47) 6730.73,4668.73 ; 6730.73,4668.73 ccw(c6722.47,4677) 6734.16,4677 cw(c6722.47,4677) 6730.73,4668.73
DB6: U22.M3 U34.22 | length 1248.4
  Top Layer w15: v1(7093.24,3996.95) U22.M3@7112.93,3977.26
  Mid-Layer 1 w7: v1(6608,4725) 6687,4646 6687,4504.62 7073.9,4117.71 7073.9,4021.9 ; 7074,4022 7073.9,4021.9 ; v1(7093.24,3996.95) 7073.9,4016.29 7073.9,4021.9 ; 6618.83,4714.17 cw(c6629.65,4725) 6614.34,4725 ccw(c6629.65,4725) 6618.83,4714.17 ; 6618.83,4714.17 ccw(c6608,4703.35) 6608,4718.66 cw(c6608,4703.35) 6618.83,4714.17 ; 7082.42,4007.77 cw(c7071.59,3996.95) 7086.9,3996.95 ccw(c7071.59,3996.95) 7082.42,4007.77 ; 7082.42,4007.77 ccw(c7093.24,4018.6) 7093.24,4003.29 cw(c7093.24,4018.6) 7082.42,4007.77
  Bottom Layer w10: v1(6608,4725) 6623.66,4709.34 U34.22@6623.66,4573.06 ; 6616.27,4716.73 cw(c6624.53,4725) 6612.84,4725 ccw(c6624.53,4725) 6616.27,4716.73 ; 6616.27,4716.73 ccw(c6608,4708.47) 6608,4720.16 cw(c6608,4708.47) 6616.27,4716.73
DB7: U22.M8 U34.23 | length 1533
  Top Layer w15: v1(7093.24,3800.1) U22.M8@7112.93,3780.41
  Mid-Layer 2 w7: v1(6576,4725) 6576,4664 6671.77,4568.23 6713,4568.23 7151,4130.23 7151,3857.85 v1(7093.24,3800.1) ; 6576,4709.69 cw(c6591.31,4709.69) 6580.48,4720.52 ccw(c6591.31,4709.69) 6576,4709.69 ; 6576,4709.69 ccw(c6560.69,4709.69) 6571.52,4720.52 cw(c6560.69,4709.69) 6576,4709.69 ; 7104.07,3810.92 cw(c7093.24,3821.75) 7093.24,3806.44 ccw(c7093.24,3821.75) 7104.07,3810.92 ; 7104.07,3810.92 ccw(c7114.9,3800.1) 7099.59,3800.1 cw(c7114.9,3800.1) 7104.07,3810.92
  Bottom Layer w10: v1(6576,4725) 6598.07,4702.93 U34.23@6598.07,4573.06 ; 6584.27,4716.73 cw(c6592.53,4725) 6580.84,4725 ccw(c6592.53,4725) 6584.27,4716.73 ; 6584.27,4716.73 ccw(c6576,4708.47) 6576,4720.16 cw(c6576,4708.47) 6584.27,4716.73
DB8: U22.M7 U34.24 | length 1503.8
  Top Layer w15: v1(7093.24,3839.47) U22.M7@7112.93,3819.78
  Mid-Layer 2 w7: v1(6545,4725) 6563,4707 6563,4648.62 6656.38,4555.23 6776.65,4435 6827.85,4435 7138,4124.85 7138,3884.22 v1(7093.24,3839.47) ; 6555.83,4714.17 cw(c6566.65,4725) 6551.34,4725 ccw(c6566.65,4725) 6555.83,4714.17 ; 6555.83,4714.17 ccw(c6545,4703.35) 6545,4718.66 cw(c6545,4703.35) 6555.83,4714.17 ; 7104.07,3850.29 cw(c7093.24,3861.12) 7093.24,3845.81 ccw(c7093.24,3861.12) 7104.07,3850.29 ; 7104.07,3850.29 ccw(c7114.9,3839.47) 7099.59,3839.47 cw(c7114.9,3839.47) 7104.07,3850.29
  Bottom Layer w10: v1(6545,4725) 6572.48,4697.52 U34.24@6572.48,4573.06 ; 6553.27,4716.73 cw(c6561.53,4725) 6549.84,4725 ccw(c6561.53,4725) 6553.27,4716.73 ; 6553.27,4716.73 ccw(c6545,4708.47) 6545,4720.16 cw(c6545,4708.47) 6553.27,4716.73
DCO: pad.0@7092.8,3136.1 R121.1 U22.M20 | length 286.7
  Top Layer w7: U22.M20@7112.93,3307.97 7092.9,3287.94 7092.9,3136.1 7123,3106 R121.1@7187,3106
DGND: U38.2 | length 102
  Bottom Layer w20: v1(5772,4150) 5813,4191 U38.2@5857,4191
DUTAVDD: C66.1 C76.1 C149.2 C150.2 C151.2 C157.2 N2.2 N2.4 pad.0@7393.88,2374 pad.0@7396.88,2200 pad.0@7398,2159 pad.0@7404,2418 U23.22 U23.24 U23.33 U23.40 U23.42 | length 668.9
  Top Layer w10: U23.24@7012.11,2650 7014.51,2652.4 7030.82,2652.4 7045,2666.59 v1(7045,2676) 7031.6,2689.4 U23.22@7012.11,2689.4 ; v1(7207,2657) 7205,2657 7196.84,2648.84 7196.84,2625.23 U23.33@7195.61,2624 7195.61,2606.39 7219.3,2582.7 C149.2@7219.3,2571.98 ; v1(7250,2699) 7248,2701 7256.1,2709.1 U23.40@7280.71,2709.1 7306.1,2709.1 7315,2718 7315,2735 7301.5,2748.5 U23.42@7280.71,2748.5
  Bottom Layer w10: C157.2@7003.69,2645.52 7012,2653.83 C151.2@7012,2676 v1(7045,2676) ; v1(7250,2699) 7278.32,2699 C150.2@7280.02,2697.3
  Bottom Layer w39.37: C66.1@7393.88,2173 7393.88,2407.88 pad.0@7404,2418
DUTDRVDD: C69.1 C158.1 C171.2 C178.2 C201.2 L29.1 pad.0@7741,2414 U23.8 U23.17 U23.48 | length 456.6
  Top Layer w10: U23.17@7012.11,2787.8 7012.91,2787 v1(7045,2787) ; U23.8@7116.91,2892.6 7116.91,2919.91 v1(7131,2934) ; U23.48@7280.71,2866.6 7315.6,2866.6 v1(7325,2876)
  Top Layer w19.68: C201.2@7658.3,2413.98 7741.16,2413.98 L29.1@7742.17,2414.99
  Top Layer w39.37: L29.1@7742.17,2414.99 7742.17,2312.95 C69.1@7745,2310.12
  Bottom Layer w10: C158.1@7006.98,2777.7 7036.7,2777.7 7045,2786 v1(7045,2787) ; C178.2@7107.3,2892.98 7107.3,2910.3 v1(7131,2934) ; C171.2@7280.98,2876.7 7324.3,2876.7 v1(7325,2876)
E1#: U22.E5 U34.98 | length 1102.5
  Top Layer w15: U22.E5@7388.52,3898.52 v1(7408.21,3918.21)
  Mid-Layer 2 w7: v1(7287,4697) 7344.62,4697 7427.55,4614.07 7427.55,3938.23 7408.21,3918.89 v1(7408.21,3918.21) ; 7302.31,4697 cw(c7302.31,4712.31) 7291.48,4701.48 ccw(c7302.31,4712.31) 7302.31,4697 ; 7302.31,4697 ccw(c7302.31,4681.69) 7291.48,4692.52 cw(c7302.31,4681.69) 7302.31,4697 ; v1@7408.21,3924.55 ccw(c7408.21,3938.21) 7417.86,3928.55 cw(c7408.21,3938.21) v1@7408.21,3924.55 ; v1@7414.55,3918.21 cw(c7431.51,3918.21) 7419.52,3930.2 ccw(c7431.51,3918.21) v1@7414.55,3918.21
  Bottom Layer w10: U34.98@7224.06,4697.07 7286.93,4697.07 v1(7287,4697) ; 7275.14,4697.07 cw(c7275.14,4685.14) 7283.58,4693.58 ccw(c7275.14,4685.14) 7275.14,4697.07 ; 7275.48,4697.07 ccw(c7275.48,4708.52) 7283.58,4700.42 cw(c7275.48,4708.52) 7275.48,4697.07
E2: U22.D5 U34.97 | length 1140.2
  Top Layer w15: U22.D5@7427.89,3898.52 v1(7447.58,3918.21)
  Mid-Layer 2 w7: v1(7310,4722) 7338,4722 7466.92,4593.08 7466.92,3938.23 7447.58,3918.89 v1(7447.58,3918.21) ; 7325.31,4722 cw(c7325.31,4737.31) 7314.48,4726.48 ccw(c7325.31,4737.31) 7325.31,4722 ; 7325.31,4722 ccw(c7325.31,4706.69) 7314.48,4717.52 cw(c7325.31,4706.69) 7325.31,4722 ; v1@7447.58,3924.55 ccw(c7447.58,3938.21) 7457.23,3928.55 cw(c7447.58,3938.21) v1@7447.58,3924.55 ; v1@7453.92,3918.21 cw(c7470.88,3918.21) 7458.89,3930.2 ccw(c7470.88,3918.21) v1@7453.92,3918.21
  Bottom Layer w10: U34.97@7224.06,4722.66 7309.34,4722.66 v1(7310,4722) ; 7296.71,4722.66 cw(c7296.71,4708.71) 7306.58,4718.58 ccw(c7296.71,4708.71) 7296.71,4722.66 ; 7299.91,4722.66 ccw(c7299.91,4732.09) 7306.58,4725.42 cw(c7299.91,4732.09) 7299.91,4722.66
E3#: U22.D3 U34.92 | length 1169.3
  Top Layer w15: U22.D3@7427.89,3977.26 v1(7447.58,3996.95)
  Mid-Layer 1 w7: v1(7287,4850) 7331,4850 7428.23,4752.77 7428.23,4016.29 v1(7447.58,3996.95) ; 7302.31,4850 cw(c7302.31,4865.31) 7291.48,4854.48 ccw(c7302.31,4865.31) 7302.31,4850 ; 7302.31,4850 ccw(c7302.31,4834.69) 7291.48,4845.52 cw(c7302.31,4834.69) 7302.31,4850 ; 7436.75,4007.77 cw(c7425.92,3996.95) 7441.23,3996.95 ccw(c7425.92,3996.95) 7436.75,4007.77 ; 7436.75,4007.77 ccw(c7447.58,4018.6) 7447.58,4003.29 cw(c7447.58,4018.6) 7436.75,4007.77
  Bottom Layer w10: U34.92@7224.06,4850.61 7286.39,4850.61 v1(7287,4850) ; 7273.83,4850.61 cw(c7273.83,4836.83) 7283.58,4846.58 ccw(c7273.83,4836.83) 7273.83,4850.61 ; 7276.79,4850.61 ccw(c7276.79,4860.21) 7283.58,4853.42 cw(c7276.79,4860.21) 7276.79,4850.61
EPSCLK: U18.6 U22.U3 | length 1470.2
  Top Layer w12: v7(6006,4503) 6007,4502 U18.6@6079.25,4502 ; U18.6@6051.52,4497.89 ccw(c6041.6,4487.97) 6041.6,4502 ccw(c6041.6,4516.03) U18.6@6051.52,4506.11 ; v7@6010.24,4498.76 cw(c6018.07,4490.93) 6018.07,4502 ccw(c6018.07,4490.93) v7@6010.24,4498.76 ; v7@6010.24,4507.24 ccw(c6022.9,4519.9) 6022.9,4502 cw(c6022.9,4519.9) v7@6010.24,4507.24
  Top Layer w15: v1(6896.39,3996.95) U22.U3@6916.08,3977.26
  Mid-Layer 1 w7: v7(6006,4503) 6180,4503 6370,4313 6731.54,4313 6877.05,4167.49 6877.05,4016.29 v1(6896.39,3996.95) ; 6026.52,4503 cw(c6026.52,4523.52) 6012.01,4509.01 ccw(c6026.52,4523.52) 6026.52,4503 ; 6026.52,4503 ccw(c6026.52,4482.48) 6012.01,4496.99 cw(c6026.52,4482.48) 6026.52,4503 ; 6885.56,4007.77 cw(c6874.74,3996.95) 6890.05,3996.95 ccw(c6874.74,3996.95) 6885.56,4007.77 ; 6885.56,4007.77 ccw(c6896.39,4018.6) 6896.39,4003.29 cw(c6896.39,4018.6) 6885.56,4007.77
EPSDA: R44.1 U18.5 U22.V1 | length 1896.2
  Top Layer w12: 5949,4621.33 cw(c6049.67,4621.33) R44.1@5978.49,4692.51 ; 5949,4650.3 cw(c6020.7,4650.3) R44.1@5970,4701 ; 5949,4679.27 cw(c5991.73,4679.27) R44.1@5961.51,4709.49 ; 5950.22,4682.22 ccw(c5931.44,4701) R44.1@5958,4701 ; R44.1@5969.51,4689.01 ccw(c5968.39,4661.61) 5949,4681 ; R44.1@5970,4702 5949,4681 ; U18.5@6051.52,4447.89 ccw(c6041.6,4437.97) 6041.6,4452 ccw(c6041.6,4466.03) U18.5@6051.52,4456.11 ; U18.5@6079.25,4452 v7(6007,4452) 5982,4452 5949,4485 5949,4681 ; 5992.51,4452 cw(c5992.51,4437.51) 6002.76,4447.76 ccw(c5992.51,4437.51) 5992.51,4452 ; 5992.51,4452 ccw(c5992.51,4466.49) 6002.76,4456.24 cw(c5992.51,4466.49) 5992.51,4452 ; 6021.49,4452 cw(c6021.49,4466.49) 6011.24,4456.24 ccw(c6021.49,4466.49) 6021.49,4452 ; 6021.49,4452 ccw(c6021.49,4437.51) 6011.24,4447.76 cw(c6021.49,4437.51) 6021.49,4452
  Top Layer w15: v1(6857.02,4075.69) U22.V1@6876.71,4056
  Mid-Layer 1 w7: v7(6007,4452) 6212,4452 6364,4300 6726.15,4300 6857.02,4169.13 v1(6857.02,4075.69) ; 6027.52,4452 cw(c6027.52,4472.52) 6013.01,4458.01 ccw(c6027.52,4472.52) 6027.52,4452 ; 6027.52,4452 ccw(c6027.52,4431.48) 6013.01,4445.99 cw(c6027.52,4431.48) 6027.52,4452 ; 6857.02,4091 cw(c6841.71,4091) 6852.54,4080.17 ccw(c6841.71,4091) 6857.02,4091 ; 6857.02,4091 ccw(c6872.33,4091) 6861.51,4080.17 cw(c6872.33,4091) 6857.02,4091
EPWP: U18.7 U22.U1 | length 1422.1
  Top Layer w12: v7(6006,4552) U18.7@6079.25,4552 ; U18.7@6051.52,4547.89 ccw(c6041.6,4537.97) 6041.6,4552 ccw(c6041.6,4566.03) U18.7@6051.52,4556.11 ; 6020.49,4552 cw(c6020.49,4566.49) 6010.24,4556.24 ccw(c6020.49,4566.49) 6020.49,4552 ; 6020.49,4552 ccw(c6020.49,4537.51) 6010.24,4547.76 cw(c6020.49,4537.51) 6020.49,4552
  Top Layer w15: v1(6896.39,4075.69) U22.U1@6916.08,4056
  Mid-Layer 1 w7: v7(6006,4552) 6150,4552 6376,4326 6736.92,4326 6896.39,4166.53 v1(6896.39,4075.69) ; 6026.52,4552 cw(c6026.52,4572.52) 6012.01,4558.01 ccw(c6026.52,4572.52) 6026.52,4552 ; 6026.52,4552 ccw(c6026.52,4531.48) 6012.01,4545.99 cw(c6026.52,4531.48) 6026.52,4552 ; 6896.39,4091 cw(c6881.08,4091) 6891.91,4080.17 ccw(c6881.08,4091) 6896.39,4091 ; 6896.39,4091 ccw(c6911.7,4091) 6900.88,4080.17 cw(c6911.7,4091) 6896.39,4091
F#LDAC: U8.2 U22.Y11 | length 1661.5
  Top Layer w15: v1(6778.28,3681.99) U22.Y11@6797.97,3662.3
  Top Layer w23.62: U8.2@5386.92,3920 v5(5464,3920)
  Mid-Layer 2 w7: v5(5464,3920) 5574,3920 5718.5,3775.5 5886.5,3775.5 5941,3721 6583.62,3721 6654.97,3649.64 6745.94,3649.64 v1(6778.28,3681.99) ; v1@6771.94,3681.99 cw(c6756.63,3681.99) 6767.45,3671.16 cw(c6778.28,3660.33) v1@6778.28,3675.64 ; 5493.57,3920 cw(c5493.57,3949.57) 5472.66,3928.66 ccw(c5493.57,3949.57) 5493.57,3920 ; 5493.57,3920 ccw(c5493.57,3890.43) 5472.66,3911.34 cw(c5493.57,3890.43) 5493.57,3920
F#SYNC: U8.5 U22.AB10 | length 1601.8
  Top Layer w15: v1(6699.54,3721.36) U22.AB10@6719.23,3701.67
  Top Layer w23.62: U8.5@5386.92,4070 v5(5463,4070)
  Mid-Layer 2 w7: v5(5463,4070) 5672,4070 5980,3762 6599,3762 6639.64,3721.36 v1(6699.54,3721.36) ; v1@6695.06,3716.87 ccw(c6684.23,3706.04) 6684.23,3721.36 ccw(c6684.23,3736.67) v1@6695.06,3725.84 ; 5492.57,4070 cw(c5492.57,4099.57) 5471.66,4078.66 ccw(c5492.57,4099.57) 5492.57,4070 ; 5492.57,4070 ccw(c5492.57,4040.43) 5471.66,4061.34 cw(c5492.57,4040.43) 5492.57,4070
FACLK: U8.7 U22.AB9 | length 1626.9
  Top Layer w15: v1(6699.54,3760.73) U22.AB9@6719.23,3741.04
  Top Layer w23.62: U8.7@5386.92,4170 v5(5470,4170)
  Mid-Layer 2 w7: v5(5470,4170) 5596,4170 5939,3827 6580.46,3827 6646.74,3760.73 v1(6699.54,3760.73) ; v1@6695.06,3756.24 ccw(c6684.23,3745.41) 6684.23,3760.73 ccw(c6684.23,3776.04) v1@6695.06,3765.21 ; 5499.57,4170 cw(c5499.57,4199.57) 5478.66,4178.66 ccw(c5499.57,4199.57) 5499.57,4170 ; 5499.57,4170 ccw(c5499.57,4140.43) 5478.66,4161.34 cw(c5499.57,4140.43) 5499.57,4170
FADOUT: U8.11 U22.AB8 | length 1843.4
  Top Layer w10: U8.11@5127.08,4320 5204,4320 5218,4306 v1(5218,4260)
  Top Layer w15: v1(6699.54,3800.1) U22.AB8@6719.23,3780.41
  Mid-Layer 2 w7: v1(5218,4260) 5219,4261 5421,4261 5545,4261 5953,3853 6591.23,3853 6644.13,3800.1 v1(6699.54,3800.1)
FASCLK: U8.8 U22.Y9 | length 1726.4
  Top Layer w15: v1(6778.28,3760.73) U22.Y9@6797.97,3741.04
  Top Layer w23.62: U8.8@5386.92,4220 v5(5470,4220)
  Mid-Layer 2 w7: v5(5470,4220) 5564.38,4220 5944.38,3840 6585.85,3840 6645.78,3780.07 6707.55,3780.07 6707.62,3780 6730.83,3780 6730.9,3780.07 6758.94,3780.07 v1(6778.28,3760.73) ; v1@6771.94,3760.73 ccw(c6756.63,3760.73) 6767.45,3771.55 ccw(c6778.28,3782.38) v1@6778.28,3767.07 ; 5499.57,4220 cw(c5499.57,4249.57) 5478.66,4228.66 ccw(c5499.57,4249.57) 5499.57,4220 ; 5499.57,4220 ccw(c5499.57,4190.43) 5478.66,4211.34 cw(c5499.57,4190.43) 5499.57,4220
FCLK_N: C60.1 U22.H22 | length 429.3
  Top Layer w7: U22.H22@7270.41,3229.23 7270.41,3221.34 7276.75,3215 7276.75,3149.86 7302.62,3124 7412.62,3124 7415.62,3121 7416,3121 7429,3108 7429,3012.62 7445.62,2996 7481.01,2996 C60.1@7497.62,2979.39
FCLK_P: C61.1 U22.H21 | length 431.9
  Top Layer w7: U22.H21@7270.41,3268.6 7270.41,3256.58 7289.75,3237.24 7289.75,3155.25 7308,3137 7418,3137 7421,3134 7421.38,3134 7442,3113.38 7442,3035 7457.4,3019.61 C61.1@7497.6,3019.61 C61.1@7497.2,3020
FDADIN: U8.3 U22.AB11 | length 1578.7
  Top Layer w15: v1(6699.54,3681.99) U22.AB11@6719.23,3662.3
  Top Layer w23.62: U8.3@5386.92,3970 5464,3970 v5(5463,3969)
  Mid-Layer 2 w7: v5(5463,3969) 5649,3969 5819,3799 5897,3799 5962,3734 6590.23,3734 6642.24,3681.99 v1(6699.54,3681.99) ; v1@6695.06,3677.5 ccw(c6684.23,3666.67) 6684.23,3681.99 ccw(c6684.23,3697.3) v1@6695.06,3686.47 ; 5492.57,3969 cw(c5492.57,3998.57) 5471.66,3977.66 ccw(c5492.57,3998.57) 5492.57,3969 ; 5492.57,3969 ccw(c5492.57,3939.43) 5471.66,3960.34 cw(c5492.57,3939.43) 5492.57,3969
FDASCLK: U8.4 U22.AA10 | length 1636.5
  Top Layer w15: v1(6738.91,3721.36) U22.AA10@6758.6,3701.67
  Top Layer w23.62: U8.4@5386.92,4020 v5(5463,4020)
  Mid-Layer 2 w7: v5(5463,4020) 5700,4020 5971,3749 6593.62,3749 6640.62,3702 6719.56,3702 v1(6738.91,3721.36) ; v1@6732.57,3721.36 cw(c6717.26,3721.36) 6728.08,3710.53 cw(c6738.91,3699.7) v1@6738.91,3715.01 ; 5492.57,4020 cw(c5492.57,4049.57) 5471.66,4028.66 ccw(c5492.57,4049.57) 5492.57,4020 ; 5492.57,4020 ccw(c5492.57,3990.43) 5471.66,4011.34 cw(c5492.57,3990.43) 5492.57,4020
FIO1: P5.7 U22.B18 | length 1069.6
  Top Layer w7: U22.B18@7506.63,3380.37 cw(c7506.63,3365.05) 7517.46,3375.88 cw(c7528.28,3386.71) U22.B18@7512.97,3386.71 ; U22.B18@7506.63,3386.71 7526.34,3367 v1(7573,3367) ; v1@7568.52,3362.52 ccw(c7557.69,3351.69) 7557.69,3367 ccw(c7557.69,3382.31) v1@7568.52,3371.48
  Mid-Layer 2 w7: v1(7573,3367) 8039.85,3367 8222.92,3183.92 8413.01,3183.92 P5.7@8418,3178.94 ; v1@7577.48,3362.52 cw(c7588.31,3351.69) 7588.31,3367 cw(c7588.31,3382.31) v1@7577.48,3371.48
FIO2: P5.8 U22.A17 | length 1077.2
  Top Layer w15: U22.A17@7546,3426.08 v1(7565.69,3406.39)
  Mid-Layer 2 w7: v1(7565.69,3406.39) 8018.84,3406.39 8207.23,3218 8457.68,3218 P5.8@8496.74,3178.94 ; v1@7570.17,3401.91 cw(c7581,3391.08) 7581,3406.39 cw(c7581,3421.7) v1@7570.17,3410.88
FIO3: P5.9 U22.C17 | length 1065.7
  Top Layer w15: U22.C17@7467.26,3426.08 v1(7486.95,3406.39)
  Mid-Layer 2 w7: v1(7486.95,3406.39) 7506.55,3426 8017.62,3426 8191.81,3251.81 8412.13,3251.81 P5.9@8418,3257.68 ; v1@7486.95,3412.73 ccw(c7486.95,3428.05) 7497.77,3417.22 ccw(c7508.6,3406.39) v1@7493.29,3406.39
FIO4: P5.10
FIO5: P5.11 U22.C16 | length 1028.2
  Top Layer w15: U22.C16@7467.26,3465.45 v1(7486.95,3445.76)
  Mid-Layer 1 w7: v1@7486.95,3439.42 cw(c7486.95,3424.11) 7497.77,3434.93 cw(c7508.6,3445.76) v1@7493.29,3445.76 ; v1(7486.95,3445.76) 7506.71,3426 8090,3426 8175,3341 8413.42,3341 P5.11@8418,3336.42
FIO6: P5.12 U22.E16 | length 1201.7
  Top Layer w15: U22.E16@7388.52,3465.45 v1(7408.21,3445.76)
  Mid-Layer 1 w7: v1(7408.21,3445.76) 7427.55,3465.1 8105.9,3465.1 8198.5,3372.5 8460.66,3372.5 P5.12@8496.74,3336.42 ; v1@7408.21,3452.1 ccw(c7408.21,3467.42) 7419.03,3456.59 ccw(c7429.86,3445.76) v1@7414.55,3445.76
FIO7: P5.13 U22.C15 | length 1028
  Top Layer w15: U22.C15@7467.26,3504.82 v1(7486.95,3485.13)
  Mid-Layer 1 w7: v1(7486.95,3485.13) 7506.29,3504.47 8124.53,3504.47 8176,3453 8380.16,3453 P5.13@8418,3415.16 ; v1@7486.95,3491.47 ccw(c7486.95,3506.79) 7497.77,3495.96 ccw(c7508.6,3485.13) v1@7493.29,3485.13
FIO8: P5.14 U22.D15 | length 1161.8
  Top Layer w15: U22.D15@7427.89,3504.82 v1(7447.58,3485.13)
  Mid-Layer 2 w7: v1@7447.58,3478.79 cw(c7447.58,3463.48) 7458.4,3474.3 cw(c7469.23,3485.13) v1@7453.92,3485.13 ; v1(7447.58,3485.13) 7467.6,3465.1 7534.33,3465.1 7534.43,3465 8016,3465 8065.34,3415.66 8343.66,3415.66 8382,3454 8457.9,3454 P5.14@8496.74,3415.16
FIO9: P5.15 U22.C14 | length 1039.1
  Top Layer w15: U22.C14@7467.26,3544.19 v1(7486.95,3524.5)
  Mid-Layer 1 w7: v1(7486.95,3524.5) 7506.44,3544 7804,3544 7837,3577 8110,3577 8154,3533 8378.9,3533 P5.15@8418,3493.9 ; v1@7486.95,3530.84 ccw(c7486.95,3546.16) 7497.77,3535.33 ccw(c7508.6,3524.5) v1@7493.29,3524.5
FIO10: P5.16 U22.D14 | length 1144.1
  Top Layer w15: U22.D14@7427.89,3544.19 v1(7447.58,3524.5)
  Mid-Layer 2 w7: v1@7447.58,3518.16 cw(c7447.58,3502.85) 7458.4,3513.67 cw(c7469.23,3524.5) v1@7453.92,3524.5 ; v1(7447.58,3524.5) 7467.6,3504.47 7557.53,3504.47 7567.6,3494.4 8369.4,3494.4 8406,3531 8459.64,3531 P5.16@8496.74,3493.9